# Altium PCB DS1302_SD2098.PcbDoc
Units mil, origin at the board's own origin, x right, y up, seen from the top; angles counter-clockwise.
Board outline 2340 x 930 mil, 2 copper layers (Top Layer, Bottom Layer); 16 components, 15 nets, 57 pads, 7 vias.
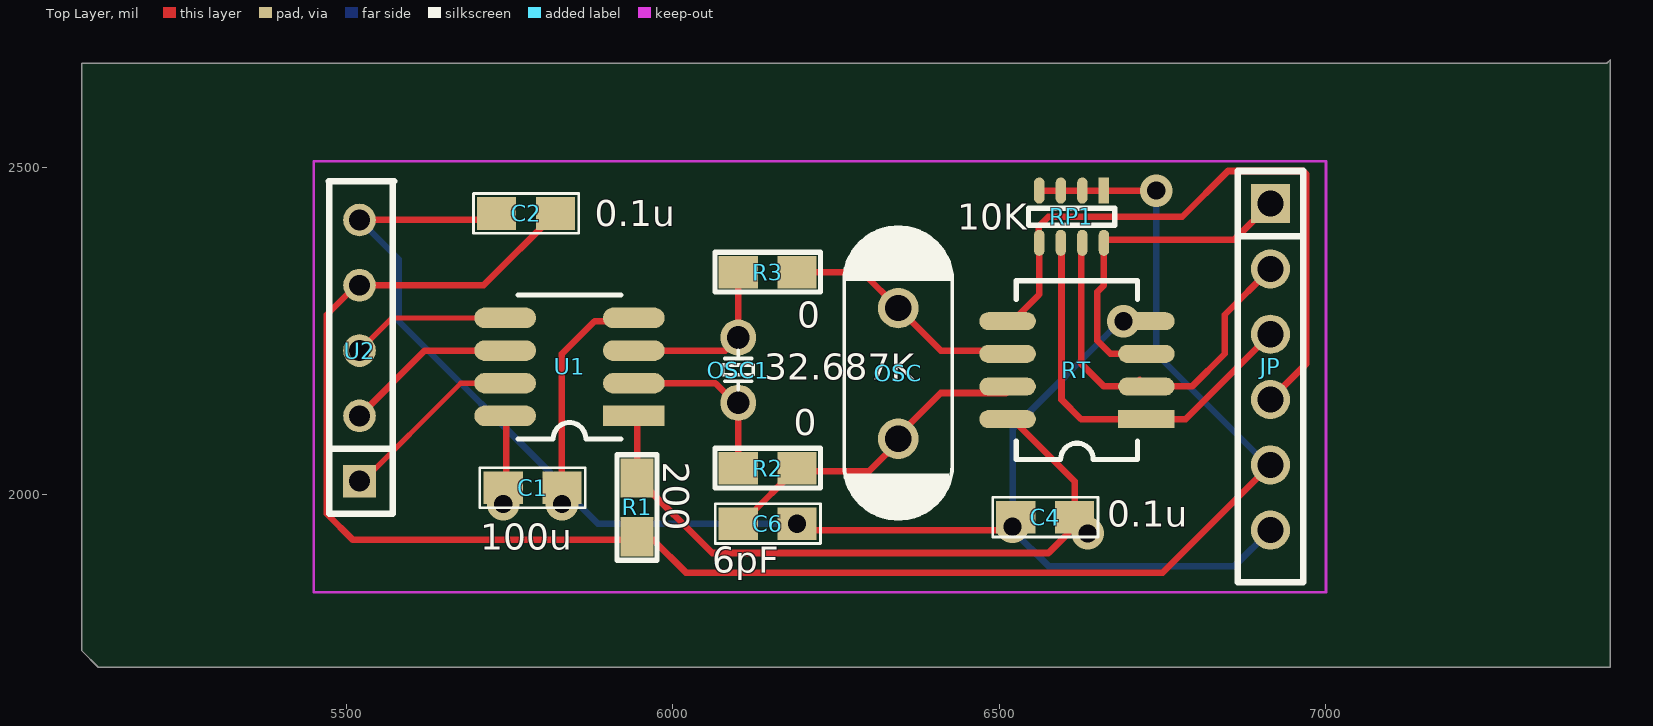
[diagram p0: Top Layer view]
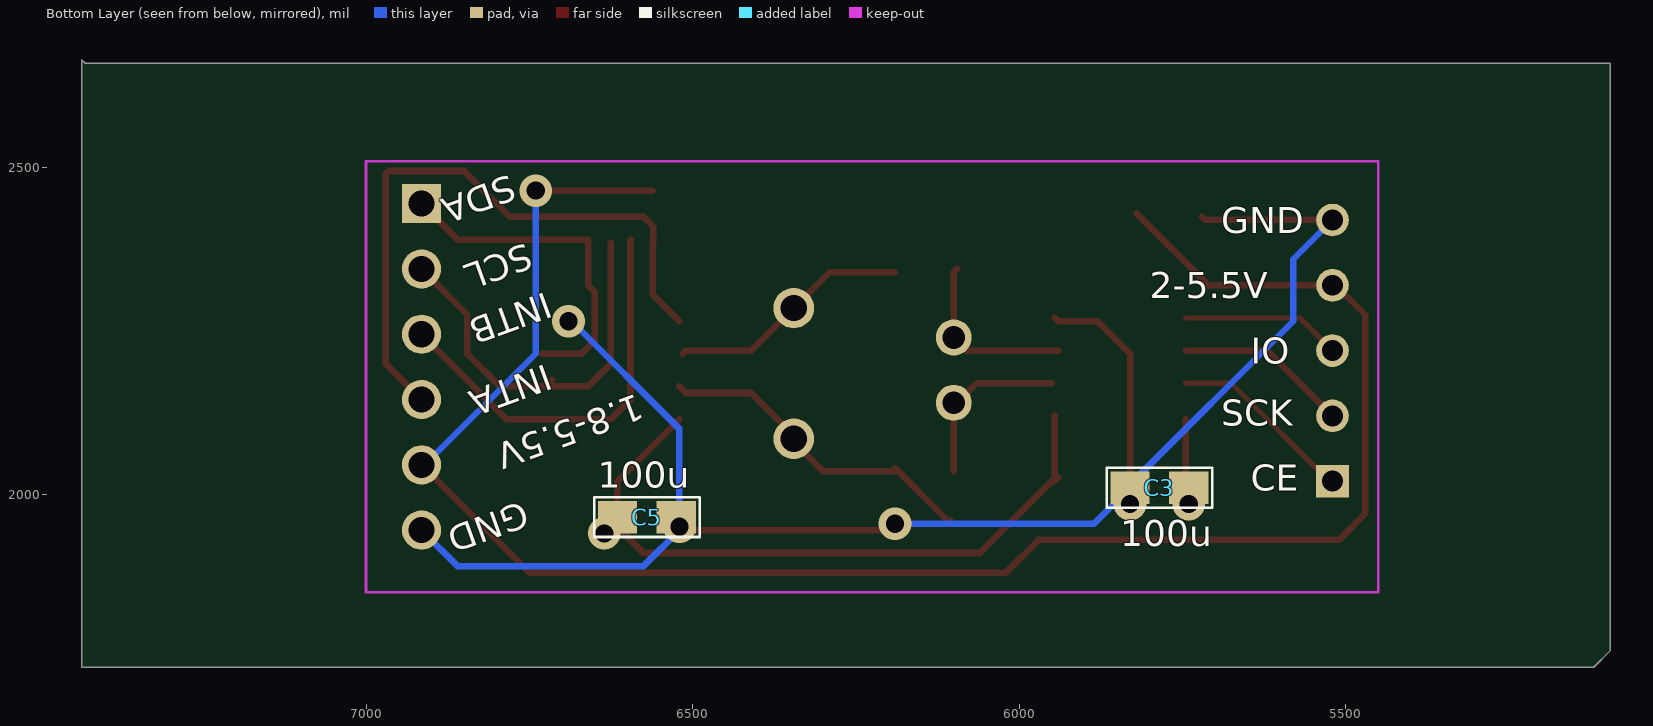
[diagram p1: Bottom Layer view, seen from below]

## Layer stack, top to bottom
Top Layer: signal copper 1.4
Dielectric: dielectric 12.6, FR-4, Dk 4.8
Bottom Layer: signal copper 1.4

## Board outline
5095,2660 7430,2660 7435,2665 7435,1735 5120,1735 5095,1760 5095,2650

## Design rules (kind name [scope] priority, off if disabled: settings)
Clearance [All] p1: gap=8
ComponentClearance [All] p1: gap=10 collisioncheckmode=3 verticalgap=10
PolygonConnect [All] p1: connectstyle=Relief reliefconductorwidth=10 reliefentries=4 polygonreliefangle="90 Angle"
RoutingVias [All] p1: holewidth=28 width=50 viastyle="Through Hole" minholewidth=6 minwidth=11.81 maxholewidth=28 maxwidth=50
SolderMaskExpansion [All] p1: expansion=4
TestPointUsage [All] p1: valid=0 allowmultiple=FALSE
Testpoint [All] p1: side=15 testpointundercomponent=TRUE minsize=40 maxsize=100 preferedsize=60 minholesize=0 maxholesize=40 preferedholesize=32 testpointgrid=1 style=1023 order=0-112345678
Width [All] p1: maxlimit=20 minlimit=6 preferedwidth=10 minimp=50.000000 maximp=50.000000 favimp=50.000000
18 further rules are at their usual default settings.

## Components (designator, comment, footprint, x,y, rotation, side; value= is the part's Value field where it differs from the comment)
C1 "100u" RC100 5820,2000 r180 top
C2 "0.1u" RC100 5740,2440 r0 top
C3 "100u" RC100 5820,2020 r180 bottom
C4 "0.1u" RC100 6535,1975 r0 top
C5 "100u" RC100 6605,1975 r180 bottom
C6 "6pF" RC100 6110,1965 r0 top
JP "6PIN" SIP6 6915,2445 r270 top
OSC "32.687K" OSC200 6345,2285 r90 top
OSC1 "32.687H" OSC100 6100,2240 r270 top
R1 "200" 0805 5950,1975 r90 top
R2 "0" 0805 6150,2045 r180 top
R3 "0" 0805 6150,2345 r180 top
RP1 "10K" RN4 6660,2465 r270 top
RT "SD2098" SOP-8_212 6725,2115 r180 top
U1 "DS1302" SO-8-197 5940,2120 r180 top
U2 "5PIN" SIP5 5520,2020 r90 top

## Footprints (in the part's own frame and the unit in brackets; to place one, negate y for a bottom-side part, rotate by r counter-clockwise, add the part's x,y. Pads: shape width x height; smd on the part's side, far side on the other; paste and mask are expansions set on the pad)
0805 [mil]
  rect 60x50 smd: 1(50,5) 2(-40,5)
  silkscreen extent -76,-26 85,36
OSC100 [mil]
  round 55 hole 35: 1(0,0) 2(100,0)
  silkscreen extent 20,-24 80,23
OSC200 [mil]
  round 62 hole 40: 1(0,0) 2(-200,0)
  silkscreen extent -323,-83 124,83
RC100 [mil]
  rect 60x50 smd: 1(-10,-10) 2(80,-10)
  silkscreen extent -45,-41 116,21
RN4 [mil]
  rect 40x16 smd: 1(0,0)
  oval 40x16 smd: 2(0,-33) 3(0,-66) 4(0,-99) 5(80,-99) 6(80,-66) 7(80,-33) 8(80,0)
  silkscreen extent 27,-116 53,17
SIP5 [mil]
  rect 50x50 hole 32: 1(0,0)
  round 50 hole 32: 2(100,0) 3(200,0) 4(300,0) 5(400,0)
  silkscreen extent -50,-53 459,47
SIP6 [mil]
  rect 60x60 hole 40: 1(0,0)
  round 60 hole 40: 2(100,0) 3(200,0) 4(300,0) 5(400,0) 6(500,0)
  silkscreen extent -50,-50 580,50
SO-8-197 [mm]
  rect 2.4x0.8 smd: 1(0,0)
  oval 2.4x0.8 smd: 2(0,-1.27) 3(0,-2.54) 4(0,-3.81) 5(5,-3.81) 6(5,-2.54) 7(5,-1.27) 8(5,0)
  silkscreen extent 0.5,-4.7 4.5,0.89
SOP-8_212 [mm]
  rect 2.2x0.7 smd: 1(0,0)
  oval 2.2x0.7 smd: 2(0,-1.27) 3(0,-2.54) 4(0,-3.81) 5(5.4,-3.81) 6(5.4,-2.54) 7(5.4,-1.27) 8(5.4,0)
  silkscreen extent 0.34,-5.38 5.06,1.57

## Part data
C1 C2 C3 C4 C5: library part CAPA
C6: library part CAPVAR
OSC OSC1: library part CRYSTAL
R1: library part RES2A
R2 R3: library part RES2B
RP1: library part RESPACK4

## Via types
v1: diameter 50, hole 28, Top Layer to Bottom Layer, 7 vias

## Nets (pads, with @x,y where several pads share a name; then routed paths per layer and width w, separated by ;. In a path a pad name is that pad's centre, name@x,y a point inside that pad or via, vN(x,y) a via of type N, cw(c..) or ccw(c..) an arc to the next point about the centre after c; other vN are vias at no path point)
CE: U1.5 U2.3 | length 245.7
  Top Layer w8: U2.3 5570,2270 U1.5@5745,2270
GND: C1.1 C2.1 C3.1 C4.1 C5.2 C6.2 JP.6 RT.4 U1.4 U2.5 | length 2633.2
  Top Layer w10: U2.5 5715,2420 C2.1@5720,2425 ; C1.1 5830,2215 5880,2265 5940,2265 U1.4@5945,2270 ; C6.2@6195,1945 6515,1945 C4.1@6530,1960
  Bottom Layer w10: U2.5@5525,2420 5525,2415 5580,2360 5580,2265 C3.1@5830,2015 ; C3.1@5820,2020 5885,1955 v1(6190,1955) ; C5.2@6520,1960 6520,1945 6575,1890 6860,1890 JP.6 ; C5.2@6520,1975 6520,2100 6685,2265 v1(6690,2265)
  other v1: 6520,1950 5830,1985
INTA: JP.4 RP1.5 RT.5 | length 977
  Top Layer w10: RT.5@6520,2265 6561,2306 RP1.5 ; RP1.5@6560,2385 6560,2410 6575,2425 6780,2425 6850,2495 6965,2495 6970,2490 6970,2200 JP.4
INTB: JP.3 RP1.6 RT.1 | length 631.3
  Top Layer w10: RP1.6@6595,2390 6595,2145 6625,2115 6785,2115 JP.3
IO: U1.6 U2.2 | length 266.4
  Top Layer w10: U2.2 5620,2220 U1.6@5745,2220
NetC1_2: C1.2 C3.2 U1.8 | length 105
  Top Layer w10: C1.2@5745,2010 U1.8@5745,2115
  other v1: 5740,1985
NetC6_1: C6.1 OSC.2 R2.2 RT.7 | length 507.8
  Top Layer w10: C6.1@6105,1960 6110,1960 R2.2 ; R2.2@6190,2035 6300,2035 6350,2085 6350,2095 6410,2155 6510,2155 RT.7@6520,2165
NetOSC_1: OSC.1 R3.2 RT.6 | length 381.8
  Top Layer w10: R3.2 6290,2340 OSC.1 ; OSC.1@6340,2285 OSC.1 ; RT.6@6515,2215 6510,2220 6410,2220 OSC.1
SCK: U1.7 U2.1 | length 289.2
  Top Layer w8: U2.1@5520,2015 5675,2170 U1.7@5745,2170
SCL: JP.2 RP1.7 RT.2 | length 613.3
  Top Layer w10: RP1.7@6625,2385 6625,2200 6660,2165 6795,2165 6845,2215 6845,2275 JP.2 ; RT.2@6715,2175 RT.2
SDA: JP.1 RP1.8 RT.3 | length 520.2
  Top Layer w10: RP1.8 6660,2320 6650,2310 6650,2235 6670,2215 RT.3@6730,2215 ; RP1.8@6660,2390 6860,2390 JP.1
VCC: C4.2 C5.1 R1.1 RT.8 U1.1 | length 1064.8
  Top Layer w10: R1.1@5940,2025 R1.1 6060,1910 6575,1910 6625,1960 6620,1960 6615,1955 6615,2020 RT.8@6520,2115 ; R1.1@5945,2020 U1.1@5945,2120
  other v1: 6635,1940
VDD: C2.2 JP.5 R1.2 RP1.1 RP1.2 RP1.3 RP1.4 U2.4 | length 2934.2
  Top Layer w10: U2.4@5515,2320 5470,2275 5470,1970 5510,1930 5970,1930 6020,1880 6750,1880 JP.5 ; U2.4 5710,2320 C2.2 ; RP1.4 v1(6740,2465)
  Bottom Layer w10: v1(6740,2465) 6740,2215 JP.5@6910,2045
X1: OSC1.2 R2.1 U1.2 | length 262.4
  Top Layer w10: U1.2@5950,2170 6065,2170 OSC1.2@6095,2140 ; R2.1@6100,2035 OSC1.2
X2: OSC1.1 R3.1 U1.3 | length 282.4
  Top Layer w10: U1.3 6080,2220 OSC1.1@6105,2245 ; R3.1@6095,2345 R3.1 OSC1.1

## Keep-outs
Keep-Out Layer:
  lines w4: 5450,1850 5450,2510 7000,2510 7000,1850 5450,1850

## Silkscreen, mask and mechanical layers (free items; w line width, h text height)
Bottom Overlay:
  text "SDA" at 6780,2490 h40 r160
  text "GND" at 5690,2400 h40
  text "SCL" at 6755,2385 h40 r160
  text "INTB" at 6725,2310 h40 r160
  text "2-5.5V" at 5800,2300 h40
  text "IO" at 5645,2200 h40
  text "INTA" at 6725,2200 h40 r160
  text "1.8-5.5V" at 6585,2155 h40 r160
  text "SCK" at 5690,2105 h40
  text "CE" at 5645,2005 h40
  text "GND" at 6760,1990 h40 r160